# Altium PCB PCB_v1.PcbDoc
Units mm, origin at the board's own origin, x right, y up, seen from the top; angles counter-clockwise.
Board outline 100 x 100 mm, 2 copper layers (Top Layer, Bottom Layer); 45 components, 48 nets, 156 pads, 0 vias.
Unrouted connection lines stored in the file: 4.
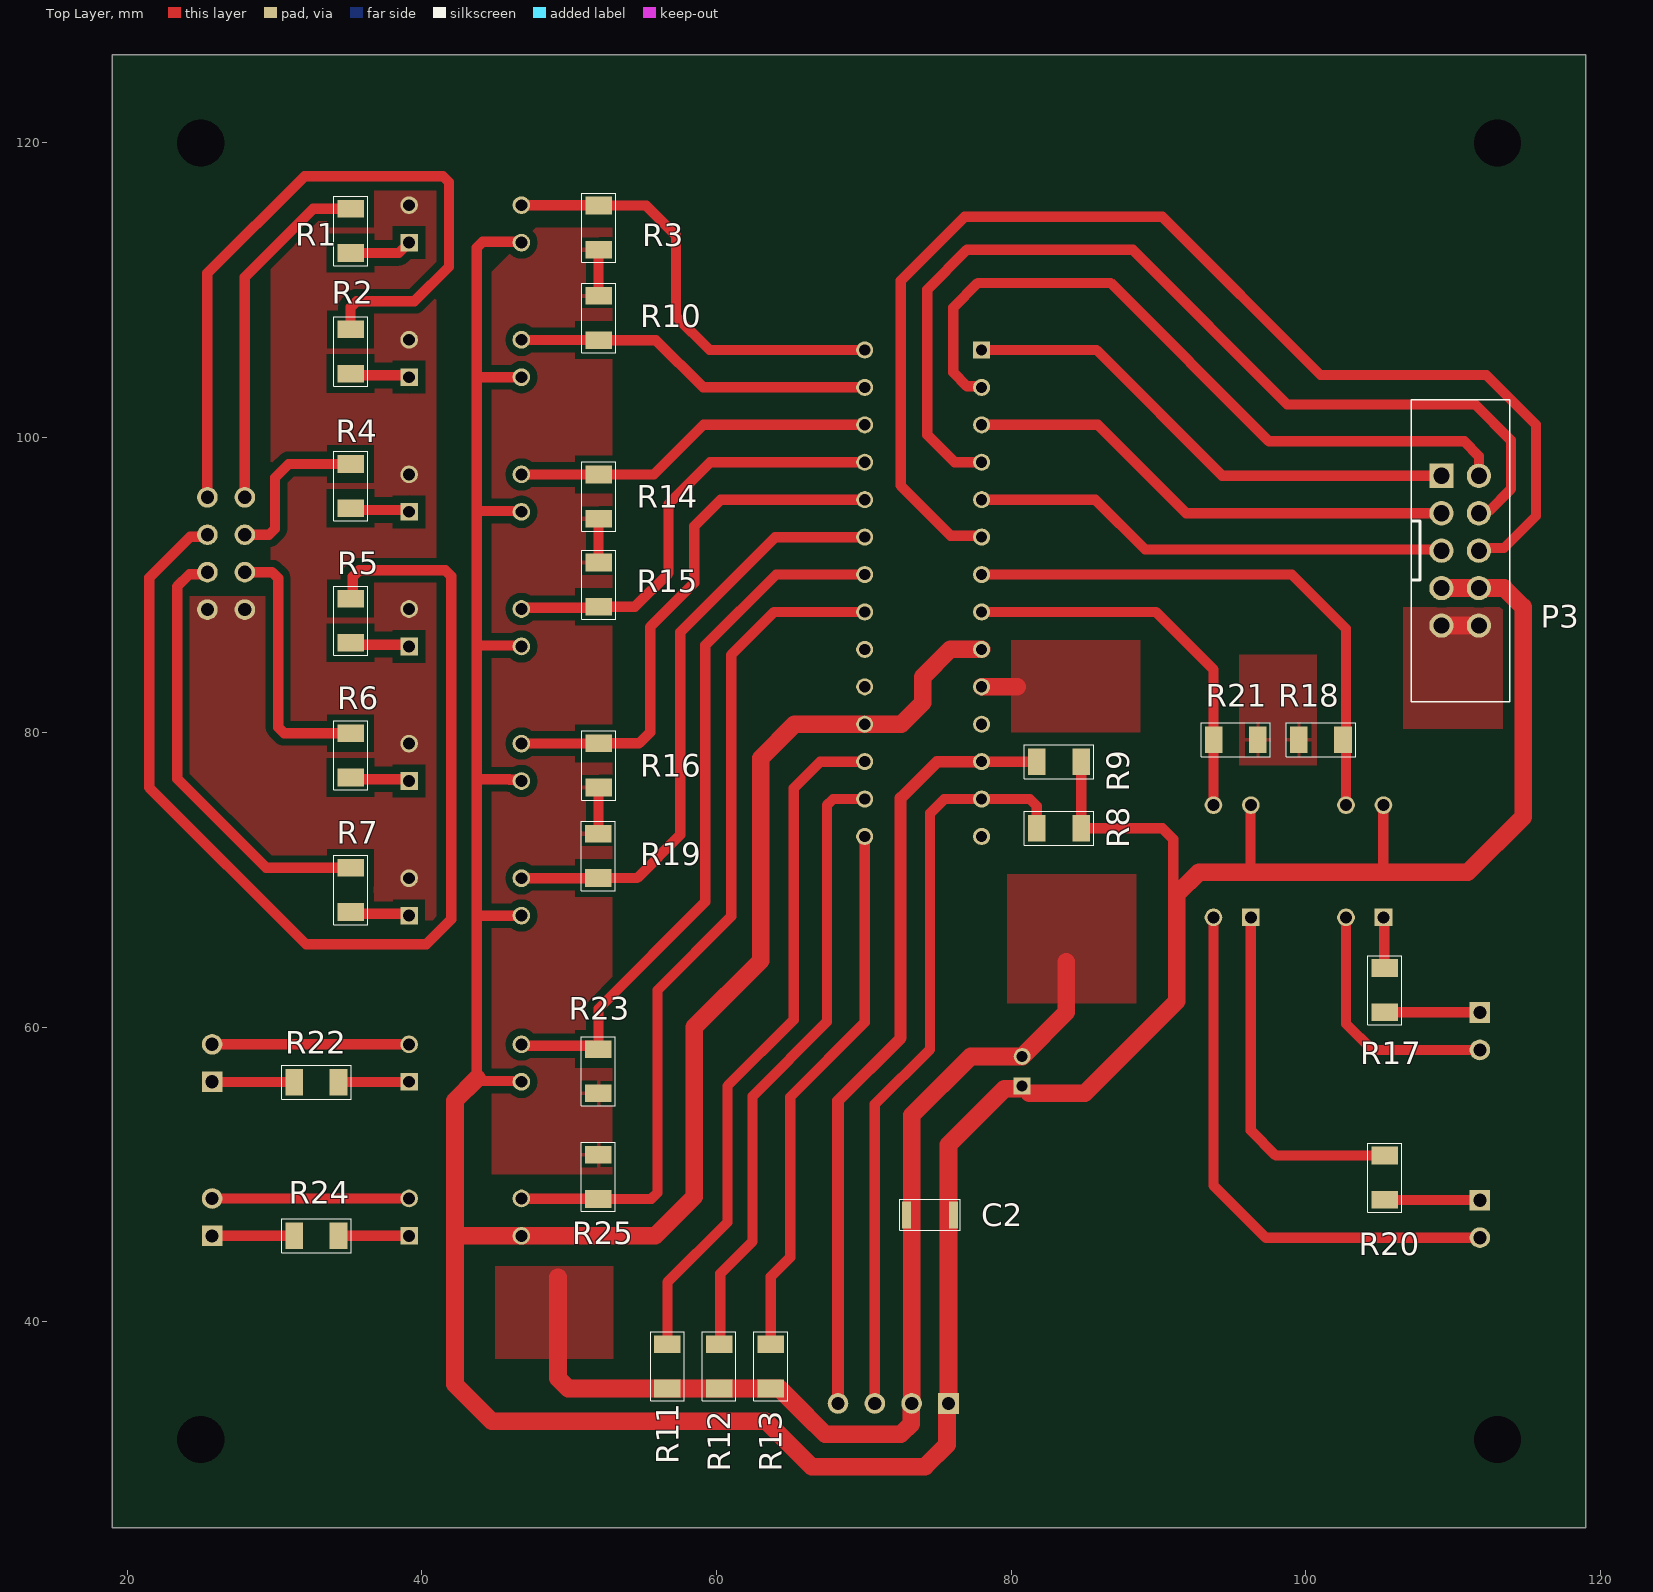
[diagram p0: Top Layer view]
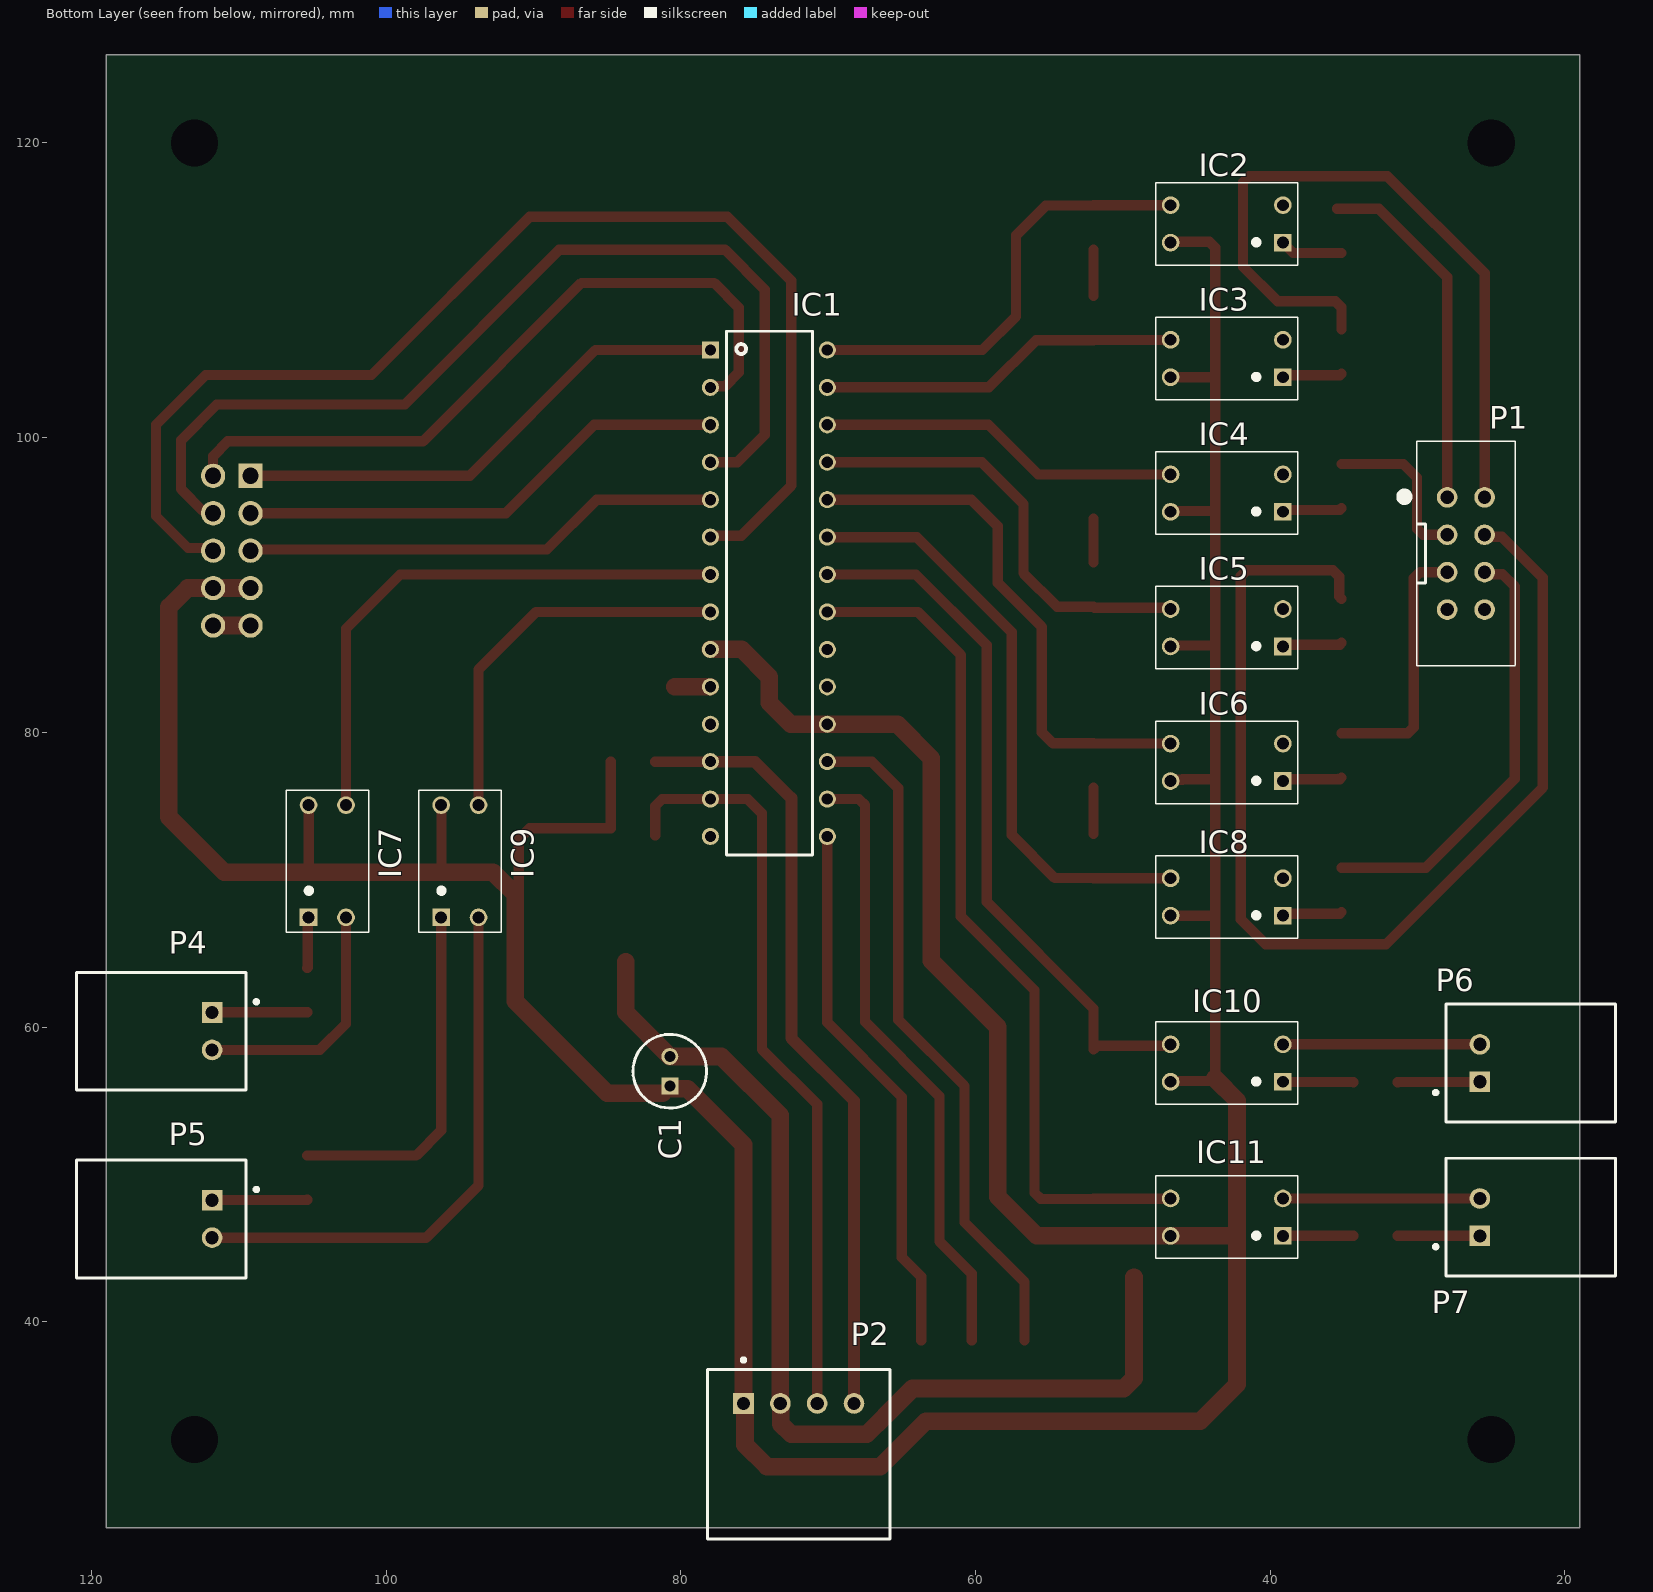
[diagram p1: Bottom Layer view, seen from below]
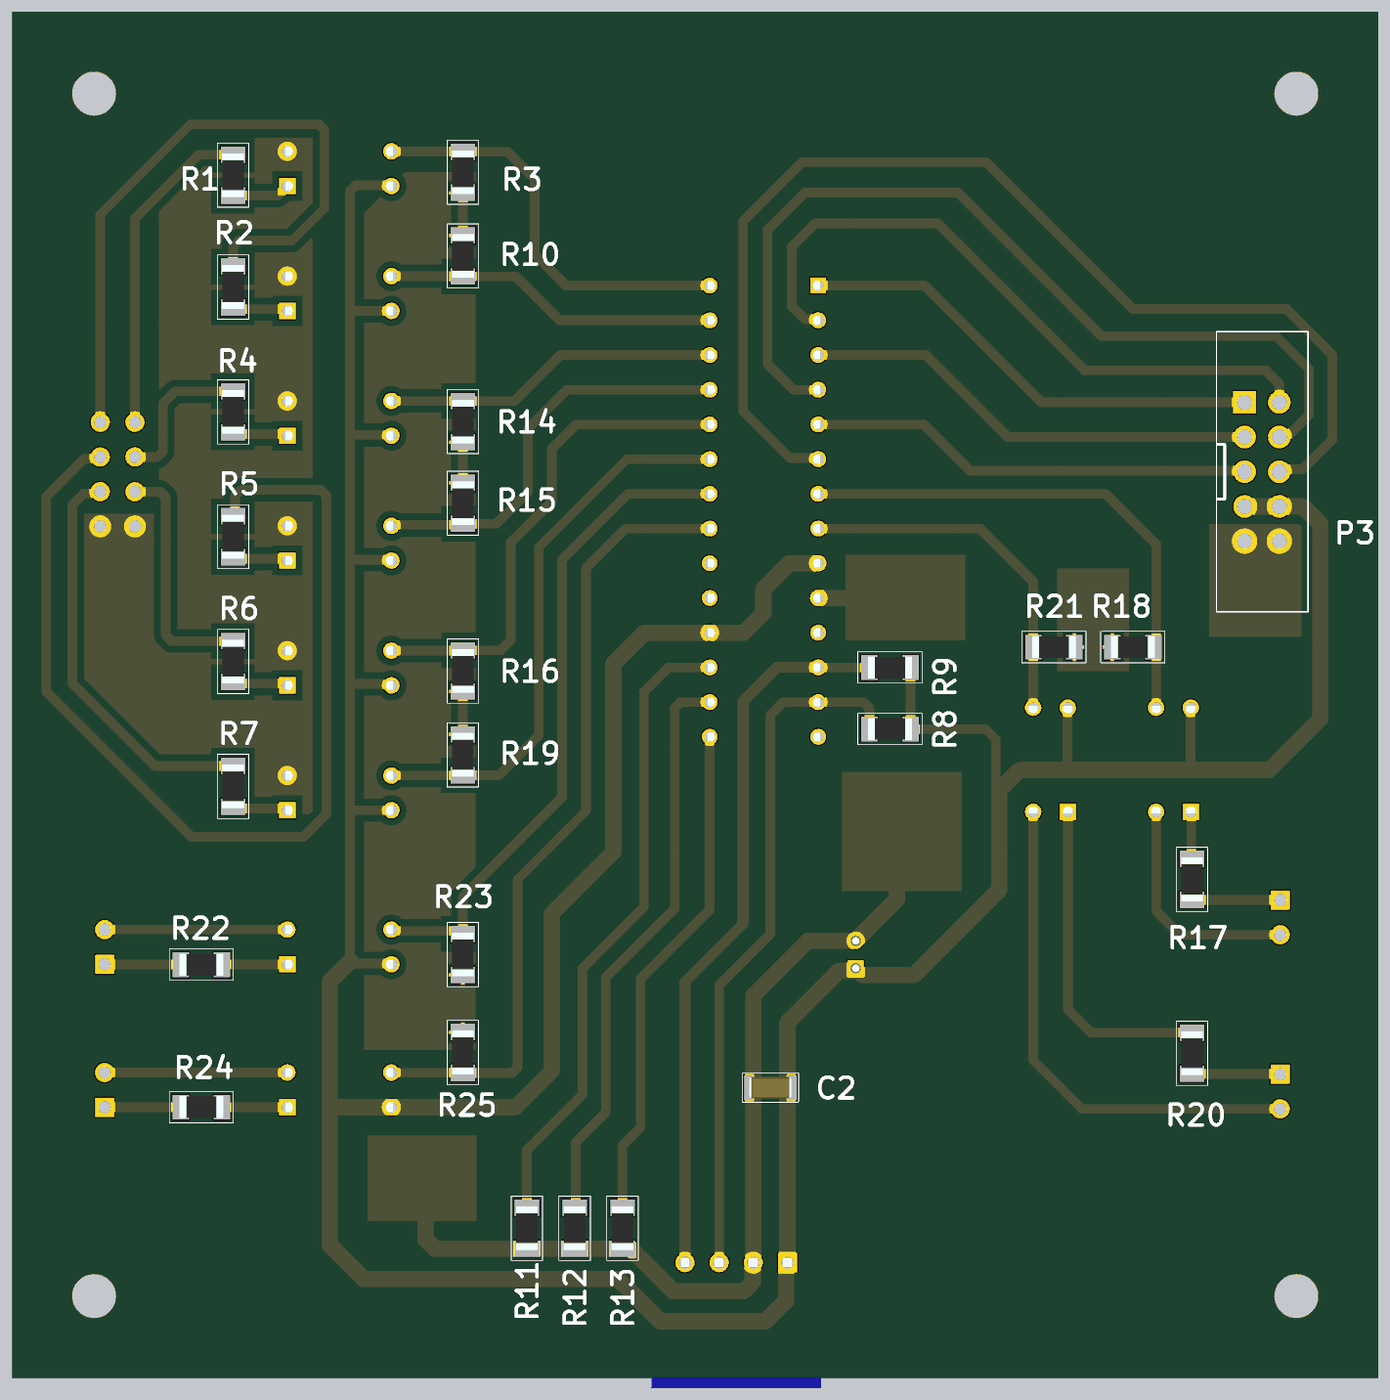
[diagram p2: 3D render of the assembled board from above, using the file's embedded part models]
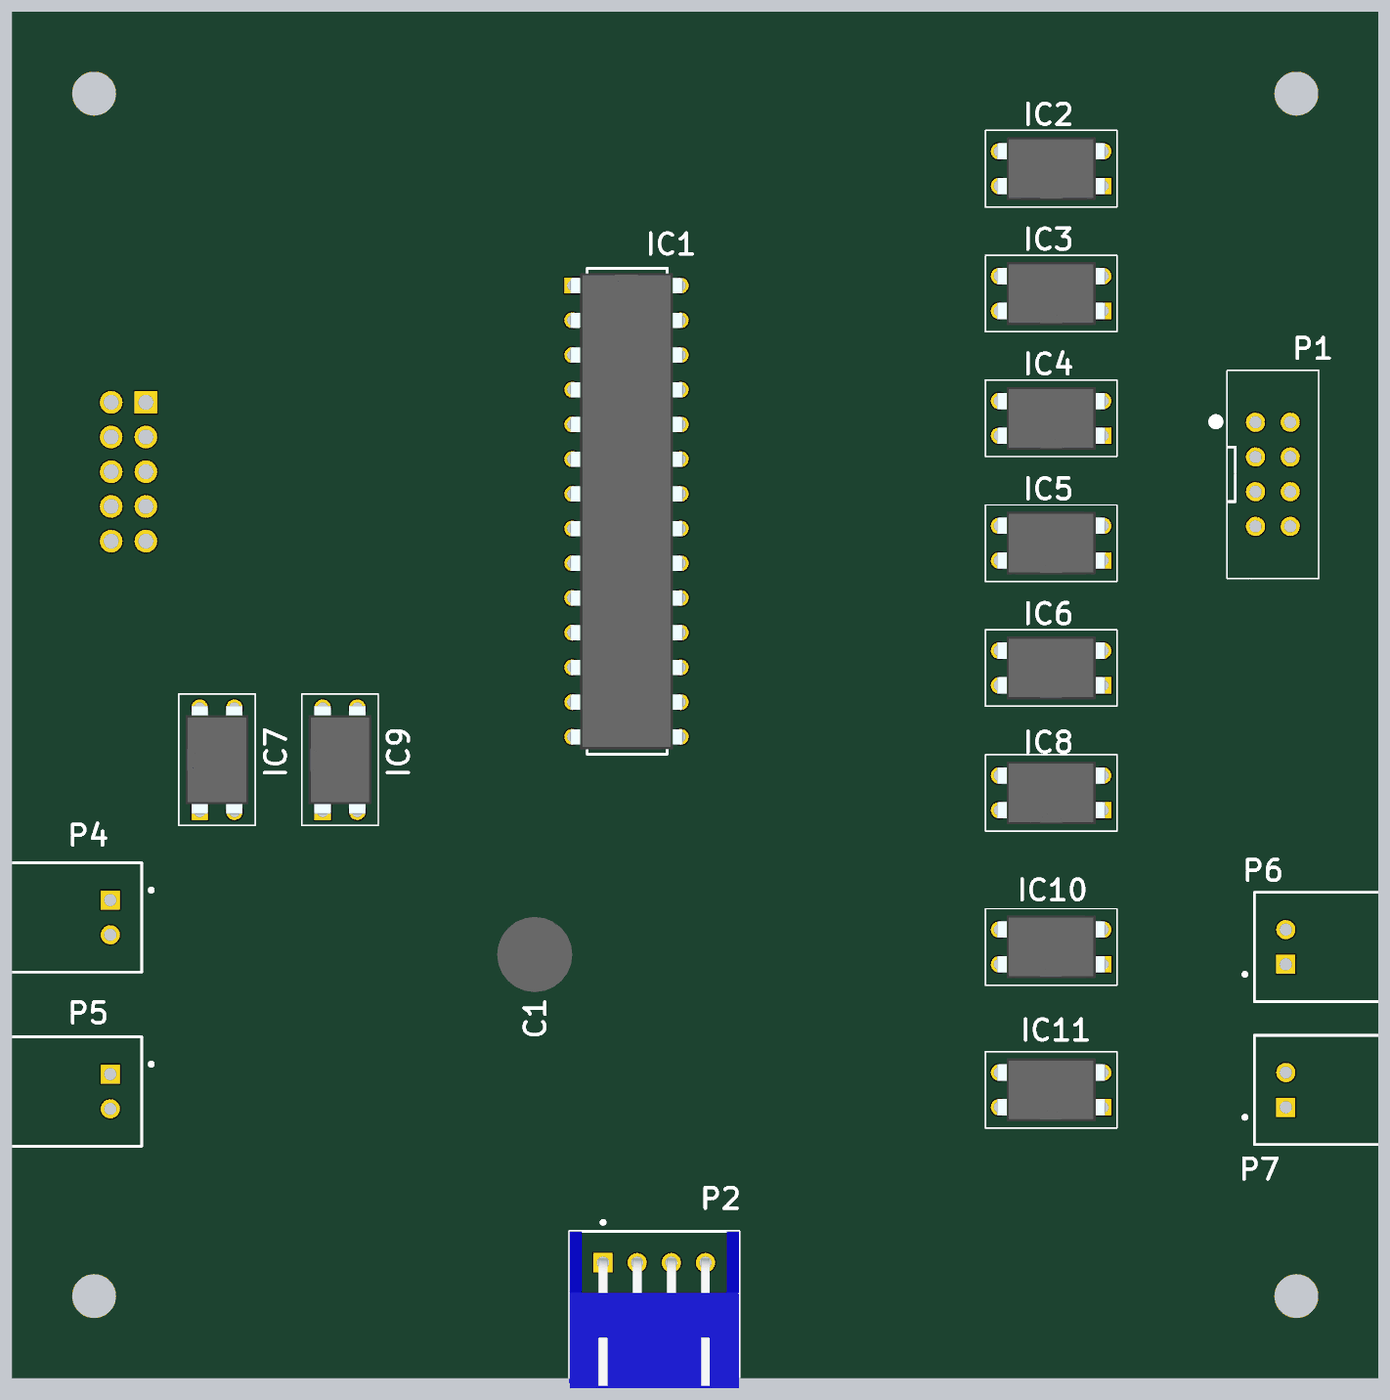
[diagram p3: 3D render of the assembled board from below, using the file's embedded part models]

## Layer stack, top to bottom
Top Solder: solder mask 0.0102, Solder Resist, Dk 3.5
Top Layer: signal copper 0.0356
Dielectric 1: dielectric 0.32, FR-4, Dk 4.8
Bottom Layer: signal copper 0.0356
Bottom Solder: solder mask 0.0102, Solder Resist, Dk 3.5

## Board outline
19,26 119,26 119,126 19,126

## Design rules (kind name [scope] priority, off if disabled: settings)
Clearance [All] p1: gap=1 ignorepadtopadclearanceinfootprint=FALSE except(0.5: Arc-Fill Arc-Poly Arc-Region Track-Fill Track-Poly Track-Region THPad-THPad THPad-Fill THPad-Poly THPad-Region Via-Via Via-Fill Via-Poly Via-Region Fill-Fill Fill-Poly Fill-Region Poly-Poly Poly-Region Region-Region; 0.7: SMDPad-Fill SMDPad-Poly SMDPad-Region Fill-Hole Poly-Hole Region-Hole; 0.8: Arc-THPad Arc-Hole Track-THPad Track-Hole)
ComponentClearance [All] p1: gap=1 collisioncheckmode=3 verticalgap=0.254 showdistances=FALSE
PolygonConnect [All] p1: thpad.connectstyle=Direct thpad.reliefconductorwidth=0.254 thpad.reliefentries=4 thpad.polygonreliefangle="90 Angle" thpad.airgapwidth=0.254 smdpad.connectstyle=Relief smdpad.reliefconductorwidth=0.254 smdpad.reliefentries=4 smdpad.polygonreliefangle="90 Angle" smdpad.airgapwidth=0.254 via.connectstyle=Relief via.reliefconductorwidth=0.254 via.reliefentries=4 via.polygonreliefangle="90 Angle" via.airgapwidth=0.254
RoutingVias [All] p1: holewidth=0.711 width=1.27 viastyle="Through Hole" minholewidth=0.711 minwidth=1.27 maxholewidth=0.711 maxwidth=1.27
SolderMaskExpansion [All] p1: expansion=0.102 istentingtop=FALSE
Width [All] p1: maxlimit=1.2 minlimit=0.7 preferedwidth=0.7 bottomlayer_maxwidth=0.7 minimp=50.000000 maximp=50.000000 favimp=50.000000
29 further rules are at their usual default settings.

## Components (designator, comment, footprint, x,y, rotation, side; value= is the part's Value field where it differs from the comment)
C1 "EEU-FR1V330" CAPPRD200W55D500H1250 80.75,56 r90 bottom
C2 "C3216C0G1H683J160AE" CAPC3216X180N 74.5,47.25 r0 top
IC1 "MCP23017-E_SP" DIP794W56P254L3486H508Q28N 74.031,89.44 r180 bottom
IC2 "LTV-817-B" DIP762W60P254L460H420Q4N 42.951,114.508 r0 bottom
IC3 "LTV-817-B" DIP762W60P254L460H420Q4N 42.951,105.372 r0 bottom
IC4 "LTV-817-B" DIP762W60P254L460H420Q4N 42.951,96.236 r0 bottom
IC5 "LTV-817-B" DIP762W60P254L460H420Q4N 42.951,87.1 r0 bottom
IC6 "LTV-817-B" DIP762W60P254L460H420Q4N 42.951,77.964 r0 bottom
IC7 "LTV-817-B" DIP762W60P254L460H420Q4N 104,71.25 r90 bottom
IC8 "LTV-817-B" DIP762W60P254L460H420Q4N 42.951,68.828 r0 bottom
IC9 "LTV-817-B" DIP762W60P254L460H420Q4N 95.002,71.25 r90 bottom
IC10 "LTV-817-B" DIP762W60P254L460H420Q4N 42.951,57.552 r0 bottom
IC11 "LTV-817-B" DIP762W60P254L460H420Q4N 42.951,47.091 r0 bottom
P1 "IDC-8pin" IDC-8PIN 26.72,92.14 r270 bottom
P2 "S4B-XH-A(LF)(SN)" JST-S4B-XH-A(LF)(SN)_V 72,34.45 r180 bottom
P3 "IDC-10pin" IDC-10PIN 110.5,92.33 r270 top
P4 "2-pin_connector" 2-pin_connector 111.816,59.711 r270 bottom
P5 "2-pin_connector" 2-pin_connector 111.816,46.974 r270 bottom
P6 "2-pin_connector" 2-pin_connector 25.771,57.552 r90 bottom
P7 "2-pin_connector" 2-pin_connector 25.771,47.091 r90 bottom
R1 "CR1206-FW-1504ELF" RESC3216X75N 35.167,114.033 r90 top
R2 "CR1206-FW-1504ELF" RESC3216X75N 35.167,105.847 r90 top
R3 "CR1206-FW-1504ELF" RESC3216X75N 52,114.25 r270 top
R4 "CR1206-FW-1504ELF" RESC3216X75N 35.167,96.711 r90 top
R5 "CR1206-FW-1504ELF" RESC3216X75N 35.167,87.575 r90 top
R6 "CR1206-FW-1504ELF" RESC3216X75N 35.167,78.439 r90 top
R7 "CR1206-FW-1504ELF" RESC3216X75N 35.167,69.303 r90 top
R8 "CR1206-FW-1504ELF" RESC3216X75N 83.25,73.5 r0 top
R9 "CR1206-FW-1504ELF" RESC3216X75N 83.25,78 r0 top
R10 "CR1206-FW-1504ELF" RESC3216X75N 52,108.121 r90 top
R11 "CR1206-FW-1504ELF" RESC3216X75N 56.676,36.967 r90 top
R12 "CR1206-FW-1504ELF" RESC3216X75N 60.176,36.967 r90 top
R13 "CR1206-FW-1504ELF" RESC3216X75N 63.676,36.967 r90 top
R14 "CR1206-FW-1504ELF" RESC3216X75N 52,96 r270 top
R15 "CR1206-FW-1504ELF" RESC3216X75N 52,90.023 r90 top
R16 "CR1206-FW-1504ELF" RESC3216X75N 52,77.75 r270 top
R17 "CR1206-FW-1504ELF" RESC3216X75N 105.361,62.5 r90 top
R18 "CR1206-FW-1504ELF" RESC3216X75N 101.03,79.5 r180 top
R19 "CR1206-FW-1504ELF" RESC3216X75N 51.99,71.611 r90 top
R20 "CR1206-FW-1504ELF" RESC3216X75N 105.361,49.776 r90 top
R21 "CR1206-FW-1504ELF" RESC3216X75N 95.25,79.5 r0 top
R22 "CR1206-FW-1504ELF" RESC3216X75N 32.85,56.25 r0 top
R23 "CR1206-FW-1504ELF" RESC3216X75N 51.99,57 r270 top
R24 "CR1206-FW-1504ELF" RESC3216X75N 32.85,45.832 r0 top
R25 "CR1206-FW-1504ELF" RESC3216X75N 51.99,49.829 r90 top

## Footprints (in the part's own frame and the unit in brackets; to place one, negate y for a bottom-side part, rotate by r counter-clockwise, add the part's x,y. Pads: shape width x height; smd on the part's side, far side on the other; paste and mask are expansions set on the pad)
2-pin_connector [mm] "Шаг 2.54мм"
  rect 1.4x1.4 hole 0.9: 1(-1.27,0)
  round 1.4 hole 0.9: 2(1.27,0)
  silkscreen extent -4,-9.2 4,3.12
CAPC3216X180N [mm]
  rect 0.62x1.82 smd: 1(-1.6,0) 2(1.6,0)
  silkscreen extent -2.06,-1.06 2.06,1.06, body extent -1.6,-0.8 1.6,0.8, height 1.8
CAPPRD200W55D500H1250 [mm]
  rect 1.15x1.15 hole 0.75: 1(0,0)
  round 1.15 hole 0.75: 2(2,0)
  silkscreen extent -1.5,-2.5 3.5,2.5, body extent -1.75,-2.75 3.75,2.75, height 12.5
DIP762W60P254L460H420Q4N [mm]
  rect 1.2x1.2 hole 0.8: 1(-3.81,1.27)
  round 1.2 hole 0.8: 2(-3.81,-1.27) 3(3.81,-1.27) 4(3.81,1.27)
  silkscreen extent -4.81,-2.8 4.81,2.8, body extent -3.96,-2.3 3.96,2.3, height 4.2
DIP794W56P254L3486H508Q28N [mm]
  rect 1.159x1.159 hole 0.759: 1(-3.969,16.51)
  round 1.159 hole 0.759: 2(-3.969,13.97) 3(-3.969,11.43) 4(-3.969,8.89) 5(-3.969,6.35) 6(-3.969,3.81) 7(-3.969,1.27) 8(-3.969,-1.27) 9(-3.969,-3.81) 10(-3.969,-6.35) 11(-3.969,-8.89) 12(-3.969,-11.43) 13(-3.969,-13.97) 14(-3.969,-16.51) 15(3.969,-16.51) 16(3.969,-13.97) 17(3.969,-11.43) 18(3.969,-8.89) 19(3.969,-6.35) 20(3.969,-3.81) 21(3.969,-1.27) 22(3.969,1.27) 23(3.969,3.81) 24(3.969,6.35) 25(3.969,8.89) 26(3.969,11.43) 27(3.969,13.97) 28(3.969,16.51)
  silkscreen extent -2.88,-17.78 2.98,17.78, body extent -4.11,-17.43 4.11,17.43, height 5.08
IDC-8PIN [mm]
  round 1.4 hole 0.9: 1(-3.81,-1.27) 2(-3.81,1.27) 3(-1.27,-1.27) 4(-1.27,1.27) 5(1.27,-1.27) 6(1.27,1.27) 7(3.81,-1.27) 8(3.81,1.27)
  silkscreen extent -7.62,-4.38 7.62,3.35
IDC-10PIN [mm]
  rect 1.65x1.65 hole 1.1: 1(-5.08,-1.29)
  round 1.65 hole 1.1: 2(-5.08,1.25) 3(-2.54,-1.29) 4(-2.54,1.25) 5(0,-1.29) 6(0,1.25) 7(2.54,-1.29) 8(2.54,1.25) 9(5.08,-1.29) 10(5.08,1.25)
  silkscreen extent -10.25,-3.35 10.25,3.35
JST-S4B-XH-A(LF)(SN)_V [mm] "Header, 4-Leads, Body 12.4x11.5mm, Pitch 2.5mm"
  rect 1.4x1.4 hole 0.9: 1(-3.75,0)
  round 1.4 hole 0.9: 2(-1.25,0) 3(1.25,0) 4(3.75,0)
  silkscreen extent -6.2,-9.2 6.2,3.08, body extent -6.2,-9.2 6.2,2.3, height 6.15
RESC3216X75N [mm]
  rect 1.2x1.8 smd: 1(-1.5,0) 2(1.5,0)
  silkscreen extent -2.35,-1.15 2.35,1.15, body extent -1.6,-0.8 1.6,0.8, height 0.75

## Part data
C1: "Capacitor Polarised", Manufacturer_Name=Panasonic, Mouser Part Number=667-EEU-FR1V330, Datasheet Link=https://componentsearchengine.com/Datasheets/1/EEU-FR1V330.pdf, Height=12.5mm, Manufacturer_Part_Number=EEU-FR1V330, Mouser Price/Stock=http://www.mouser.com/Search/ProductDetail.aspx?qs=ob%252bdNz2%252bYEhHeC0uCpfxxQ%3d%3d
C2: "Capacitor", Manufacturer_Name=TDK, Mouser Part Number=810-C3216C0G1H683J16, Datasheet Link=https://product.tdk.com/info/en/catalog/datasheets/mlcc_commercial_midvoltage_en.pdf, Height=1.8mm, Manufacturer_Part_Number=C3216C0G1H683J160AE, Mouser Price/Stock=https://www.mouser.co.uk/ProductDetail/TDK/C3216C0G1H683J160AE?qs=P1JMDcb91o7iXP%252BmsCRcbg%3D%3D
IC1: "Integrated Circuit", Arrow Part Number=MCP23017-E/SP, Manufacturer_Name=Microchip, Mouser Part Number=579-MCP23017-E/SP, Arrow Price/Stock=https://www.arrow.com/en/products/mcp23017-esp/microchip-technology, Datasheet Link=http://docs-emea.rs-online.com/webdocs/137e/0900766b8137eed4.pdf, Height=5.08mm, Manufacturer_Part_Number=MCP23017-E/SP, Mouser Price/Stock=https://www.mouser.co.uk/ProductDetail/Microchip-Technology/MCP23017-E-SP?qs=usxtMOJb1RyESXZDw7ia5A%3D%3D
IC2 IC3 IC4 IC5 IC6 IC7 IC8 IC9 IC10 IC11: "Integrated Circuit", Manufacturer_Name=Lite-On, Mouser Part Number=N/A, Arrow Part Number=LTV-817-B, Arrow Price/Stock=https://www.arrow.com/en/products/ltv-817-b/lite-on-technology, Datasheet Link=http://optoelectronics.liteon.com/upload/download/DS-70-96-0016/LTV-8X7%20series%20201610%20.pdf, Height=4.2mm, Manufacturer_Part_Number=LTV-817-B, Mouser Price/Stock=https://www.mouser.co.uk/ProductDetail/Lite-On/LTV-817-B?qs=5Clb0NIqk7HzP4M9tIz87Q%3D%3D
P2: "Male Header, Pitch 2.5 mm, 1 x 4 Position, Height 6.1 mm, Tail Length 3.4 mm, -25 to 85 degC, RoHS, Bulk", ComponentLink1Description="Manufacturer URL", ComponentLink1URL=http://www.jst.com/home2.html, ComponentLink2Description=Datasheet, ComponentLink2URL=http://www.jst-mfg.com/product/pdf/eng/eXH.pdf, DatasheetVersion=May-16, PackageDescription="Male Header, Pitch 2.5 mm, 1 x 4 Position, Height 6.1 mm, Tail Length 3.4 mm", PackageReference=S4B-XH-A(LF)(SN)
R1 R2 R3 R4 R5 R6 R7 R8 R9 R10 R11 R12 R13 R14 R15 R16 R17 R18 R19 R20 R21 R22 R23 R24 R25: "Resistor", Manufacturer_Name=Bourns, Mouser Part Number=652-CR1206FW1504ELF, Arrow Part Number=CR1206-FW-1504ELF, Arrow Price/Stock=https://www.arrow.com/en/products/cr1206-fw-1504elf/bourns, Datasheet Link=http://componentsearchengine.com/Datasheets/1/CR1206-FW-1504ELF.pdf, Height=0.75mm, Manufacturer_Part_Number=CR1206-FW-1504ELF, Mouser Price/Stock=https://www.mouser.co.uk/ProductDetail/Bourns/CR1206-FW-1504ELF/?qs=6oMev5NRZMFfvXkOpYL2%252BA%3D%3D
P1 P3: ComponentLink1Description="Manufacturer URL", ComponentLink2Description=Datasheet, DatasheetVersion=May-16, PackageReference=IDC-8pin
P4 P5 P6 P7: ComponentLink1Description="Manufacturer URL", ComponentLink2Description=Datasheet, DatasheetVersion=May-16

## Free pads (board coordinates)
  round 1 hole 3.2: 9(25,32) 9(25,120) 9(113,32) 9(113,120)

## Nets (pads, with @x,y where several pads share a name; then routed paths per layer and width w, separated by ;. In a path a pad name is that pad's centre, name@x,y a point inside that pad or via, vN(x,y) a via of type N, cw(c..) or ccw(c..) an arc to the next point about the centre after c; other vN are vias at no path point)
+3.3V_RPI: C1.1 C2.2 IC1.9 IC1.18 IC2.4 IC3.4 IC4.4 IC5.4 IC6.4 IC7.4 IC8.4 IC9.4 IC10.4 IC11.4 P2.1 P3.7 P3.8 R8.2 R9.2 | length 320.4
  Top Layer w0.7: 44.141,95.025 46.703,95.025 IC4.4 ; IC10.4 46.703,56.34 44.141,56.34 43.731,56.75 43.731,67.558 ; IC8.4 43.731,67.558 ; IC6.4 46.666,76.79 45.955,76.79 45.937,76.808 43.731,76.808 ; IC5.4 46.703,85.889 43.964,85.889 43.731,86.121 ; IC3.4 43.731,104.102 ; IC2.4 46.703,113.297 44.141,113.297 43.731,112.887 43.731,104.102 ; C1.1 C1.1@81.25,55.5 ; R9.2 R8.2 90.25,73.5 91,72.75 91,69 ; 96.25,70.5 96.25,75.038 IC9.4 ; 105.25,70.5 105.25,75.04 IC7.4 ; 43.731,67.558 43.731,76.808 ; 43.731,76.808 43.731,86.121 ; 43.731,86.121 43.731,104.102
  Top Layer w1.2: 43.75,56.5 42.25,55 42.25,45.75 ; P2.1@75.65,34.35 75.65,31.65 74.15,30.15 66.469,30.15 63.369,33.25 44.75,33.25 42.25,35.75 42.25,45.75 ; P2.1 75.75,47.25 75.75,52 79.55,55.8 C1.1@80.75,55.8 ; IC1.9 75.88,85.63 74,83.75 74,82 72.55,80.55 IC1.18 65.3,80.55 63,78.25 63,64.5 58.5,60 58.5,48.481 55.84,45.821 IC11.4 42.321,45.821 42.25,45.75 ; C1.1@81.25,55.5 85,55.5 91.25,61.75 91.25,68.75 ; 91.25,69 92.75,70.5 96.25,70.5 105.25,70.5 111,70.5 114.75,74.25 114.75,88.5 113.46,89.79 P3.8 P3.7
ADD_SIG_1: IC1.7 IC7.3 R18.1 | length 38.2
  Top Layer w0.7: IC1.7 99.04,90.71 102.73,87.02 102.73,79.25 IC7.3
ADD_SIG_2: IC1.8 IC9.3 R21.1 | length 26.6
  Top Layer w0.7: IC1.8 89.83,88.17 93.739,84.261 93.739,79.676 93.736,79.673 93.736,75.064 IC9.3
ADD_SIG_3: IC1.22 IC10.3 R23.1 | length 48.6
  Top Layer w0.7: IC10.3 46.857,58.726 51.763,58.726 R23.1 51.99,58.744 51.996,58.75 51.996,61.246 59.25,68.5 59.25,85.904 64.056,90.71 IC1.22
ADD_SIG_4: IC1.21 IC11.3 R25.1 | length 58.3
  Top Layer w0.7: IC11.3@46.689,48.345 51.973,48.345 R25.1 55.59,48.329 56,48.739 56,62.5 61.002,67.502 61.002,85.252 63.92,88.17 IC1.21
ARD_SIG_1: IC1.1 P3.1 | length 34.7
  Top Layer w0.7: IC1.1 85.8,105.95 94.34,97.41 P3.1
ARD_SIG_2: IC1.2 P3.2 | length 49.3
  Top Layer w0.7: IC1.2 77.912,103.498 77.002,103.498 76.07,104.43 76.07,108.82 77.75,110.5 86.75,110.5 97.5,99.75 110.75,99.75 111.75,98.75 P3.2
ARD_SIG_3: IC1.3 P3.3 | length 33.7
  Top Layer w0.7: IC1.3 85.88,100.87 91.88,94.87 P3.3
ARD_SIG_4: IC1.4 P3.4 | length 66.6
  Top Layer w0.7: IC1.4 76.17,98.33 74.3,100.2 74.3,110.05 77,112.75 88.25,112.75 98.75,102.25 111.5,102.25 113.925,99.825 113.925,96.509 112.468,95.052 111.932,95.052 P3.4
ARD_SIG_5: IC1.5 P3.5 | length 32.6
  Top Layer w0.7: IC1.5 85.71,95.79 89.09,92.41 109.13,92.41 P3.5
ARD_SIG_6: IC1.6 P3.6 | length 82.7
  Top Layer w0.7: IC1.6 77.912,93.338 75.912,93.338 72.5,96.75 72.5,110.654 76.846,115 90.25,115 101,104.25 112.25,104.25 115.625,100.875 115.625,94.683 113.454,92.512 111.932,92.512 P3.6
LAMP_SIG_1: IC1.28 IC2.3 R3.1 | length 30.6
  Top Layer w0.7: IC2.3 46.776,115.764 51.986,115.764 R3.1 55.25,115.75 57.25,113.75 57.25,108.25 59.55,105.95 IC1.28
LAMP_SIG_2: IC1.27 IC3.3 R10.1 | length 24.6
  Top Layer w0.7: IC3.3 46.772,106.631 51.989,106.631 R10.1 55.879,106.621 59.09,103.41 IC1.27
LAMP_SIG_3: IC1.26 IC4.3 R14.1 | length 24.7
  Top Layer w0.7: IC4.3 46.765,97.503 51.997,97.503 R14.1 55.75,97.5 59.12,100.87 IC1.26
LAMP_SIG_4: IC1.25 IC5.3 R15.1 | length 30.2
  Top Layer w0.7: IC5.3 46.838,88.447 51.924,88.447 R15.1 54.465,88.523 56.75,90.808 56.75,95.5 59.58,98.33 IC1.25
LAMP_SIG_5: IC1.24 IC6.3 R16.1 | length 36.6
  Top Layer w0.7: IC6.3 46.769,79.242 51.992,79.242 R16.1 54.75,79.25 55.5,80 55.5,87.154 58.5,90.154 58.5,94 60.29,95.79 IC1.24
LAMP_SIG_6: IC1.23 IC8.3 R19.1 | length 40.9
  Top Layer w0.7: IC8.3 46.768,70.104 51.983,70.104 R19.1 54.611,70.111 57.55,73.05 57.55,86.8 64,93.25 IC1.23
NetIC1_15: IC1.15 R13.2 | length 36.9
  Top Layer w0.7: R13.2@63.676,38.717 63.676,43.051 65,44.375 65,55.25 70.062,60.312 IC1.15
NetIC1_16: IC1.16 R12.2 | length 42
  Top Layer w0.7: R12.2@60.25,38.75 60.25,43.25 62.45,45.45 62.45,55.296 67.5,60.346 67.5,75.06 67.91,75.47 IC1.16
NetIC1_17: IC1.17 R11.2 | length 46.6
  Top Layer w0.7: R11.2@56.676,38.717 56.676,42.676 60.75,46.75 60.75,56 65.25,60.5 65.25,76.214 67.046,78.01 IC1.17
NetIC2_1: IC2.1 R1.1 | length 4.3
  Top Layer w0.7: R1.1 38.436,112.533 IC2.1
NetIC3_1: IC3.1 R2.1 | length 4.1
  Top Layer w0.7: R2.1 35.29,104.225 39.019,104.225 IC3.1 IC3.1@39.09,104.051
NetIC4_1: IC4.1 R4.1 | length 4.1
  Top Layer w0.7: R4.1 35.29,95.089 39.019,95.089 IC4.1
NetIC5_1: IC5.1 R5.1 | length 4.1
  Top Layer w0.7: R5.1 35.29,85.953 39.019,85.953 IC5.1 IC5.1@39.101,85.79
NetIC6_1: IC6.1 R6.1 | length 4.1
  Top Layer w0.7: R6.1 35.29,76.817 39.019,76.817 IC6.1
NetIC7_1: IC7.1 R17.2 | length 3.5
  Top Layer w0.7: IC7.1 105.315,67.395 105.315,64.045 R17.2
NetIC7_2: IC7.2 P4.2 | length 17
  Top Layer w0.7: IC7.2 102.73,60.221 104.51,58.441 P4.2
NetIC8_1: IC8.1 R7.1 | length 4.1
  Top Layer w0.7: R7.1 35.29,67.681 39.019,67.681 IC8.1 IC8.1@39.112,67.529
NetIC9_1: IC9.1 R20.2 | length 24.3
  Top Layer w0.7: IC9.1 96.272,52.978 97.974,51.276 R20.2
NetIC9_2: IC9.2 P5.2 | length 37.7
  Top Layer w0.7: IC9.2 93.732,49.268 97.296,45.704 P5.2
NetIC10_1: IC10.1 R22.2 | length 4.7
  Top Layer w0.7: R22.2 34.366,56.266 39.036,56.266 IC10.1@39.052,56.282
NetIC10_2: IC10.2 P6.2 | length 13.3
  Top Layer w0.7: P6.2 IC10.2@39.052,58.822
NetIC11_1: IC11.1 R24.2 | length 4.7
  Top Layer w0.7: R24.2 34.355,45.827 39.047,45.827 IC11.1@39.052,45.821
NetIC11_2: IC11.2 P7.2 | length 13.4
  Top Layer w0.7: P7.2 IC11.2
NetP1_1: P1.1 R1.2 | length 24.3
  Top Layer w0.7: P1.1 27.99,110.89 32.633,115.533 R1.2@35.471,115.533
NetP1_2: P1.2 R2.2 | length 49.6
  Top Layer w0.7: P1.2 25.45,111.15 32.05,117.75 41.44,117.75 41.85,117.34 41.85,111.6 39.5,109.25 35.577,109.25 35.167,108.84 R2.2
NetP1_3: P1.3 R4.2 | length 11.2
  Top Layer w0.7: P1.3 29.63,93.41 30.04,93.82 30.04,97.29 30.961,98.211 R4.2
NetP1_4: P1.4 R5.2 | length 76.9
  Top Layer w0.7: P1.4 25.316,93.276 24.276,93.276 21.5,90.5 21.5,76.25 32.142,65.608 40.301,65.608 42,67.308 42,90.59 41.59,91 35.75,91 35.315,90.565 35.315,89.223 R5.2
NetP1_5: P1.5 R6.2 | length 17.6
  Top Layer w0.7: P1.5 29.84,90.87 30.25,90.46 30.25,80.349 30.66,79.939 R6.2
NetP1_6: P1.6 R7.2 | length 29.8
  Top Layer w0.7: P1.6 25.316,90.736 24.236,90.736 23.4,89.9 23.4,76.85 29.447,70.803 R7.2
NetP4_1: P4.1 R17.1 | length 6.5
  Top Layer w0.7: R17.1 105.37,60.991 111.806,60.991 P4.1
NetP5_1: P5.1 R20.1 | length 6.5
  Top Layer w0.7: R20.1 105.377,48.26 111.799,48.26 P5.1
NetP6_1: P6.1 R22.1 | length 5.6
  Top Layer w0.7: P6.1 25.787,56.266 31.334,56.266 R22.1
NetP7_1: P7.1 R24.1 | length 5.6
  Top Layer w0.7: P7.1 25.776,45.827 31.345,45.827 R24.1
RPI_GND: C1.2 C2.1 IC1.10 P2.2 P3.9 P3.10 R3.2 R10.2 R11.1 R12.1 R13.1 R14.2 R15.2 R16.2 R18.2 R19.2 R21.2 R23.2 R25.2 | length 84.6
  Top Layer w0.7: R19.2 51.995,73.116 51.995,76.245 R16.2 ; R15.2 R14.2 ; R10.2 R3.2
  Top Layer w1.2: 49.25,43.022 49.25,36.169 49.953,35.467 R11.1 R12.1 R13.1 64.283,35.467 66.15,33.6 66.15,33.58 67.38,32.35 72.509,32.35 73.212,33.053 73.212,34.27 P2.2@73.212,34.412 ; P2.2 73.25,47.25 73.25,54 77.25,58 C1.2 83.75,61 83.75,64.425 ; IC1.10 80.41,83.09 ; P3.9 P3.10
SCL: IC1.12 P2.4 R9.1 | length 53.1
  Top Layer w0.7: IC1.12 78.005,78.005 81.745,78.005 R9.1
  Top Layer w0.8: P2.4 68.25,55 72.5,59.25 72.5,75.535 74.975,78.01 IC1.12
SDA: IC1.13 P2.3 R8.1 | length 51.4
  Top Layer w0.7: P2.3 70.75,54.75 74.5,58.5 74.5,74.5 75.47,75.47 IC1.13 81.28,75.47 81.75,75 R8.1@81.75,73
SIG_GND: IC2.2 IC3.2 IC4.2 IC5.2 IC6.2 IC8.2 P1.7 P1.8
pads on no net: IC1.11 IC1.14 IC1.19 IC1.20

## Polygon pours and split planes (outlines as drawn)
RPI_GND on Top Layer "RPI_GND_L01_P018" (solid, pour order 18): 79.75,61.625 79.75,70.375 88.5,70.375 88.5,61.625
RPI_GND on Top Layer "RPI_GND_L01_P017" (solid, pour order 17): 80,86.25 88.75,86.25 88.75,80 80,80
RPI_GND on Top Layer "RPI_GND_L01_P016" (solid, pour order 16): 106.625,88.5 113.375,88.5 113.375,80.25 106.625,80.25
no net on Top Layer "NONET_L01_P015" (solid, pour order 15): 105.75,87.75
RPI_GND on Top Layer "RPI_GND_L01_P014" (solid, pour order 14): 95.5,77.75 95.5,85.25 100.75,85.25 100.75,77.75
RPI_GND on Top Layer "RPI_GND_L01_P013" (solid, pour order 13): 45,43.75 45,37.5 53,37.5 53,43.75
RPI_GND on Top Layer "RPI_GND_L01_P012" (solid, pour order 12): 44.75,111.25 47.75,114.25 52.938,114.25 52.938,50 44.75,50
no net on Top Layer "NONET_L01_P010" (solid, pour order 10): 45,123.5
SIG_GND on Top Layer "SIG_GND_L01_P009" (solid, pour order 9): 29.75,89.25 29.75,114 32.5,116.75 41,116.75 41,67.25 36.75,67.25 36.75,70.553 29.447,70.553 23.4,76.6 23.5,76.7 23.5,89.25
SIG_GND on Top Layer "SIG_GND_L01_P008" (solid, pour order 8): 31.4,112.4
SIG_GND on Top Layer "SIG_GND_L01_P006" (solid, pour order 6): 73.5,93.9
SIG_GND on Top Layer "SIG_GND_L01_P004" (solid, pour order 4): 68.85,76.425
no net on Top Layer "NONET_L01_P001" (solid, pour order 1): 134,64

## Silkscreen, mask and mechanical layers (free items; w line width, h text height)
Mechanical 15:
  lines w0.2: 21,28 117,28 117,124 21,124 21,28